# EAGLE board High-Level PCB v3.0 - 100 auto route (EAGLE 8.7.0)
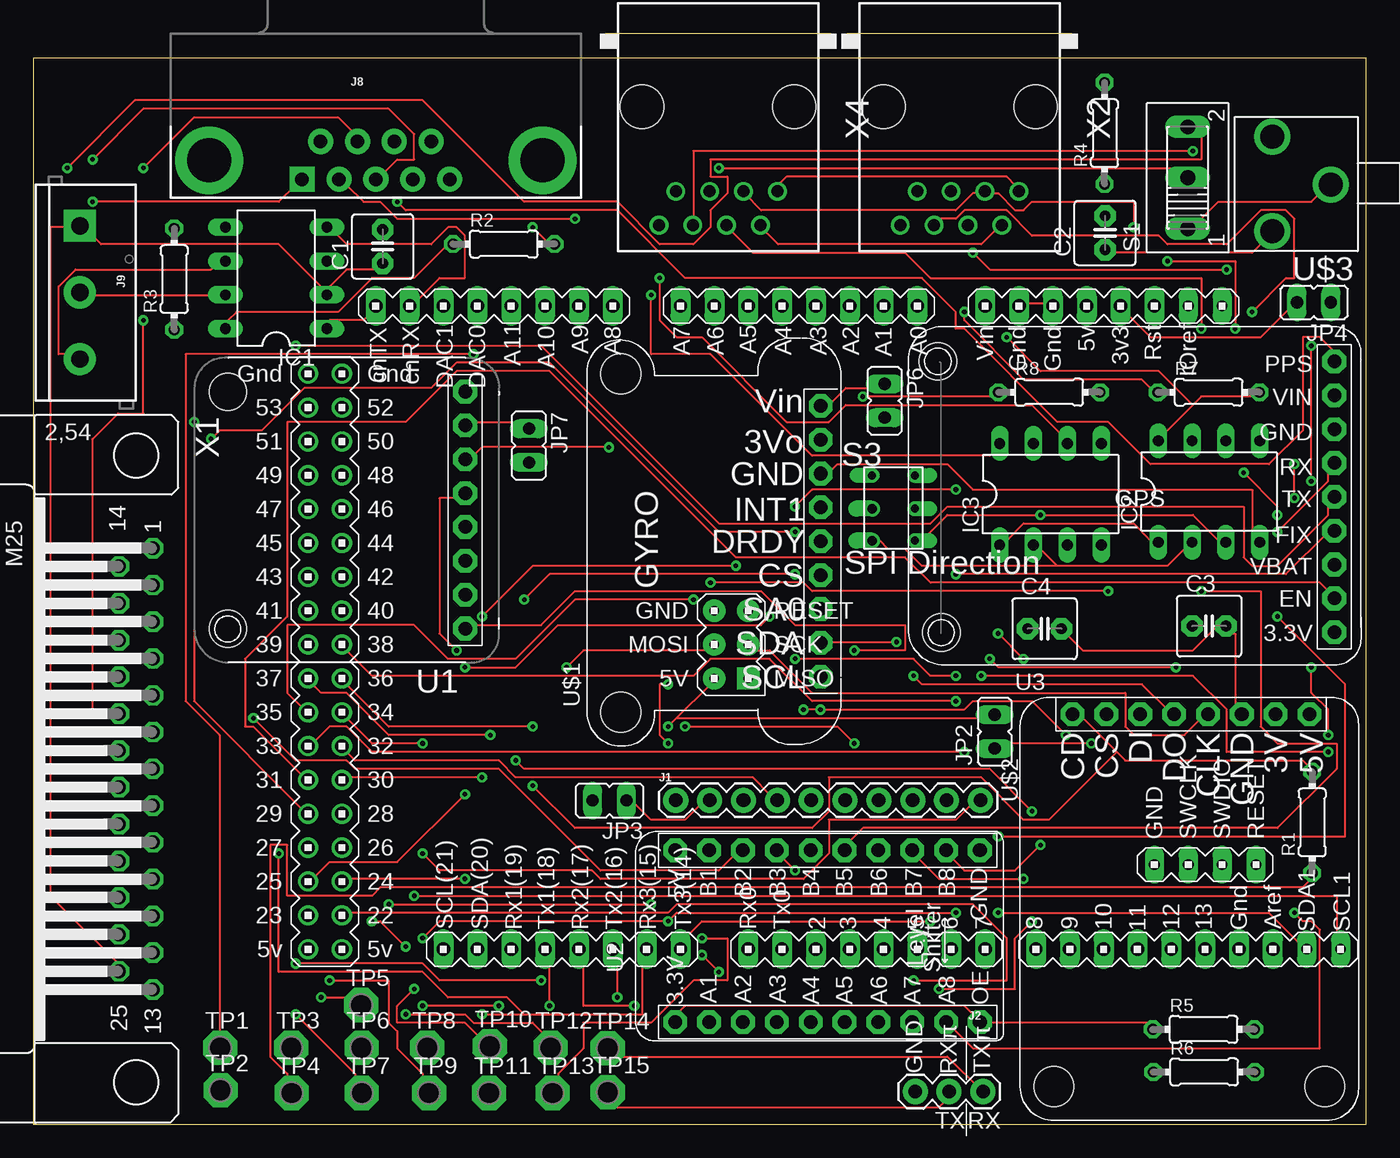
[diagram p0: board, top side]
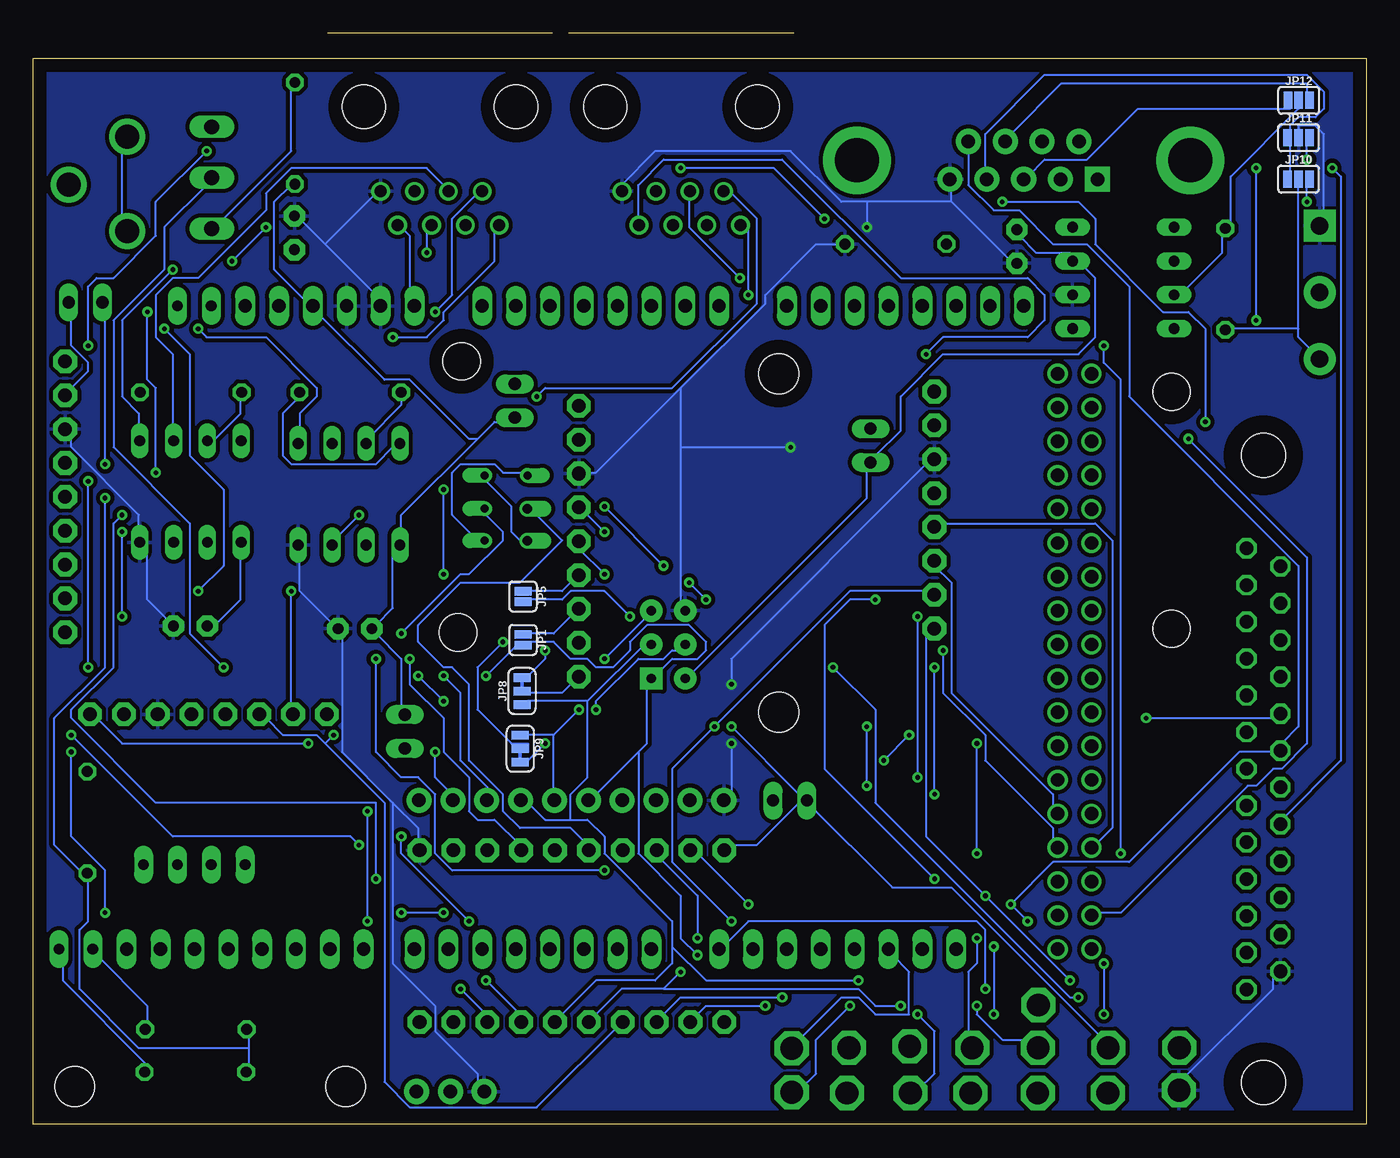
[diagram p1: board, bottom side, seen from below]

Size 100 x 80 mm. Coordinates in mm from the lower left corner, seen from the top.
Outline: 0,0 100,0 100,80 0,80 0,0
Copper layers (1*16): Top 0.035mm / dielectric 1.5mm / Bottom 0.035mm
Design rules "default": minimum track width 6mil, minimum drill 0.35mm, track to track 6mil, track to pad 6mil, pad to pad 6mil, via to via 6mil, smd to smd 6mil, copper to edge 40mil, drill to drill 6mil, minimum pad ring 10mil, minimum via ring 8mil, stop-mask expansion 4mil, vias tented up to drill 0mil, thermal gap 10mil
Net classes: 1 Power: width 0.508 mm, drill 0.305 mm, clearance 0.254 mm

## Footprints (pad centres in the part's own frame; a part is rotated, then mirrored left to right if it is on the bottom)
C2.5-5 = drill 0.813 pad 1.6 octagon: 1 -1.27,0; 2 1.27,0
DIL08 = drill 0.813 long: 1 -3.81,-3.81; 2 -1.27,-3.81; 3 1.27,-3.81; 4 3.81,-3.81; 5 3.81,3.81; 6 1.27,3.81; 7 -1.27,3.81; 8 -3.81,3.81
1X10 = drill 1.016 pad 1.88: 1 0,0; 2 2.54,0; 3 5.08,0; 4 7.62,0; 5 10.16,0; 6 12.7,0; 7 15.24,0; 8 17.78,0; 9 20.32,0; 10 22.86,0
1X03 = drill 1.016 pad 1.88: 1 2.54,0; 2 0,0; 3 -2.54,0
DB9_MALE = drill 1.016 pad 1.88: 1 5.54,-1.42; 2 2.77,-1.42; 3 0,-1.42; 4 -2.77,-1.42; 6 4.15,1.42; 7 1.38,1.42; 8 -1.38,1.42; 9 -4.15,1.42 | drill 1.016 pad 1.88 square: 5 -5.54,-1.42 | drill 3.302 pad 5.08: G1 -12.5,0; G2 12.5,0
SCREWTERMINAL-5MM-3 = drill 1.3 pad 2.413 square: 1 0,0 | drill 1.3 pad 2.413: 2 5,0; 3 10,0
SMT-JUMPER_2_NO_SILK = smd 0.635 x 1.27: 1 -0.406,0; 2 0.406,0
JP1 = drill 0.914 long: 1 0,-1.27; 2 0,1.27
SMT-JUMPER_3_1-NC_TRACE_SILK = smd 0.635 x 1.27: 1 -1.016,0; 2 0,0; 3 1.016,0
SMT-JUMPER_3_NO_SILK = smd 0.635 x 1.27: 1 -0.813,0; 2 0,0; 3 0.813,0
DUE(NORMAL) = drill 1 long: 2 -16.51,30.48; 3 -19.05,30.48; 3V3 -39.37,-17.78; 4 -21.59,30.48; 5 -24.13,30.48; 5V -36.83,-17.78; 6 -26.67,30.48; 7 -29.21,30.48; 8 -33.02,30.48; 9 -35.56,30.48; 10 -38.1,30.48; 11 -40.64,30.48; 12 -43.18,30.48; 13 -45.72,30.48; A0 -24.13,-17.78; A1 -21.59,-17.78; A2 -19.05,-17.78; A3 -16.51,-17.78; A4 -13.97,-17.78; A5 -11.43,-17.78; A6 -8.89,-17.78; A7 -6.35,-17.78; A8 -1.27,-17.78; A9 1.27,-17.78; A10 3.81,-17.78; A11 6.35,-17.78; AREF -50.8,30.48; CANRX 13.97,-17.78; CANTX 16.51,-17.78; DAC0 8.89,-17.78; DAC1 11.43,-17.78; GND1 -48.26,30.48; GND_1 -34.29,-17.78; GND_2 -31.75,-17.78; RESET -41.91,-17.78; RX0 -11.43,30.48; RX1 6.35,30.48; RX2 1.27,30.48; RX3 -3.81,30.48; SCL 11.43,30.48; SDA 8.89,30.48; TX0 -13.97,30.48; TX1 3.81,30.48; TX2 -1.27,30.48; TX3 -6.35,30.48; VIN -29.21,-17.78 | drill 1: 5V_A 19.05,30.48; 5V_B 21.59,30.48; 22 19.05,27.94; 23 21.59,27.94; 24 19.05,25.4; 25 21.59,25.4; 26 19.05,22.86; 27 21.59,22.86; 28 19.05,20.32; 29 21.59,20.32; 30 19.05,17.78; 31 21.59,17.78; 32 19.05,15.24; 33 21.59,15.24; 34 19.05,12.7; 35 21.59,12.7; 36 19.05,10.16; 37 21.59,10.16; 38 19.05,7.62; 39 21.59,7.62; 40 19.05,5.08; 41 21.59,5.08; 42 19.05,2.54; 43 21.59,2.54; 44 19.05,0; 45 21.59,0; 46 19.05,-2.54; 47 21.59,-2.54; 48 19.05,-5.08; 49 21.59,-5.08; 50 19.05,-7.62; 51 21.59,-7.62; 52 19.05,-10.16; 53 21.59,-10.16; GND_A 19.05,-12.7; GND_B 21.59,-12.7 | drill 0.7 pad 1.676: 5V_ICSP -8.89,5.08; GND_ICSP -8.89,10.16; MOSI_ICSP -8.89,7.62; RESET_ICSP -11.43,5.08; SCK_ICSP -11.43,7.62 | drill 0.8 pad 1.422 long: GND_DEBUG -41.91,24.13; IOREF -44.45,-17.78; NC -46.99,-17.78; RESET_DEBUG -49.53,24.13; SCL1 -55.88,30.48; SDA1 -53.34,30.48; SWCLK_DEBUG -44.45,24.13; SWDIO_DEBUG -46.99,24.13 | drill 0.7 pad 1.676 square: MISO_ICSP -11.43,10.16
0204/7 = drill 0.813 octagon: 1 -3.81,0; 2 3.81,0
255SB = drill 1.118 long: 1 -3.81,0; 2 0,0; 3 3.81,0
DPDT = drill 0.6 offset: 1 3.2,4.9; 2 3.2,2.4; 3 3.2,0; 4 0,4.9 | drill 0.7 offset: 5 0,2.4; 6 0,0
P1-17 = drill 1.702 pad 2.54 octagon: TP 0,0
ELCOMPASS = drill 1.016 pad 1.778 octagon: 1 1.27,1.27; 2 1.27,3.81; 3 1.27,6.35; 4 1.27,8.89; 5 1.27,11.43; 6 1.27,13.97; 7 1.27,16.51; 8 1.27,19.05 | hole 2.8: 19.066,19.07; 19.066,1.29
ELSHIFTER = drill 1.016 pad 1.778 octagon: 1 0,11.43; 2 0,8.89; 3 0,6.35; 4 0,3.81; 5 0,1.27; 6 0,-1.27; 7 0,-3.81; 8 0,-6.35; 9 0,-8.89; 10 0,-11.43; 11 12.89,11.43; 12 12.89,8.89; 13 12.89,6.35; 14 12.89,3.81; 15 12.89,1.27; 16 12.89,-1.27; 17 12.89,-3.81; 18 12.89,-6.35; 19 12.89,-8.89; 20 12.89,-11.43
ELGPS = drill 1.016 pad 1.778 octagon: 1 0,-10.16; 2 0,-7.62; 3 0,-5.08; 4 0,-2.54; 5 0,0; 6 0,2.54; 7 0,5.08; 8 0,7.62; 9 0,10.16 | hole 2.8: 29.48,10.18; 29.74,-10.18
ELGYRO = drill 1.016 pad 1.778 octagon: 1 21.59,2.54; 2 19.05,2.54; 3 16.51,2.54; 4 13.97,2.54; 5 11.43,2.54; 6 8.89,2.54; 7 6.35,2.54; 8 3.81,2.54; 9 1.27,2.54 | hole 3: -1.397,17.526; 24.003,17.526
ELSDCARD = drill 1.016 pad 1.778 octagon: 1 1.27,1.27; 2 1.27,3.81; 3 1.27,6.35; 4 1.27,8.89; 5 1.27,11.43; 6 1.27,13.97; 7 1.27,16.51; 8 1.27,19.05 | hole 3: -26.67,0.127; -26.67,20.447
2.5MMJACK = drill 1.8: 1 2,5.1; 2 6.4,1.5; 3 6.4,8.6
M25H = drill 1.016 octagon: 1 -16.561,1.27; 2 -13.792,1.27; 3 -11.049,1.27; 4 -8.28,1.27; 5 -5.512,1.27; 6 -2.769,1.27; 7 0,1.27; 8 2.769,1.27; 9 5.512,1.27; 10 8.28,1.27; 11 11.049,1.27; 12 13.792,1.27; 13 16.561,1.27; 14 -15.189,-1.27; 15 -12.421,-1.27; 16 -9.652,-1.27; 17 -6.909,-1.27; 18 -4.14,-1.27; 19 -1.372,-1.27; 20 1.372,-1.27; 21 4.14,-1.27; 22 6.909,-1.27; 23 9.652,-1.27; 24 12.421,-1.27; 25 15.189,-1.27 | hole 3.302: 23.52,0; -23.52,0
RJ45-NO-SHIELD = drill 0.9 pad 1.4: 1 -4.445,6.35; 2 -3.175,8.89; 3 -1.905,6.35; 4 -0.635,8.89; 5 0.635,6.35; 6 1.905,8.89; 7 3.175,6.35; 8 4.445,8.89 | hole 3.251: -5.715,0; 5.715,0

## Placement (x,y rotation side)
C1  0.1 uF  [C2.5-5]  26.21,65.87 90 top
C2  1 uF  [C2.5-5]  80.41,66.89 90 top
C3  0.1 uF  [C2.5-5]  88.22,37.39 0 top
C4  0.1 uF  [C2.5-5]  75.87,37.19 0 top
IC1  MCP2551  [DIL08]  18.22,63.51 90 top
IC2  DS8921  [DIL08]  88.21,47.48 0 top
IC3  DS8921  [DIL08]  76.31,47.28 0 top
J1  Optical Mouse  [1X10]  48.2,24.32 0 top
J2  RaspπUart  [1X03]  68.71,2.46 0 top
J8  DB9 Plug  [DB9_MALE]  25.7,72.33 0 top
J9  CAN Output  [SCREWTERMINAL-5MM-3]  3.49,67.42 270 top
JP1  [SMT-JUMPER_2_NO_SILK]  63.27,36.35 270 bottom
JP2  MicroSD Power  [JP1]  72.12,29.47 0 top
JP3  Mouse Power  [JP1]  43.23,24.3 90 top
JP4  GPS Power  [JP1]  96.08,61.67 90 top
JP5  [SMT-JUMPER_2_NO_SILK]  63.27,39.61 270 bottom
JP6  Gyro Power  [JP1]  63.88,54.29 180 top
JP7  Compass Power  [JP1]  37.19,50.93 180 top
JP8  [SMT-JUMPER_3_1-NC_TRACE_SILK]  63.33,32.5 90 bottom
JP9  [SMT-JUMPER_3_1-NC_TRACE_SILK]  63.47,28.19 270 bottom
JP10  [SMT-JUMPER_3_NO_SILK]  5.08,70.93 0 bottom
JP11  [SMT-JUMPER_3_NO_SILK]  5.07,74.03 0 bottom
JP12  [SMT-JUMPER_3_NO_SILK]  5.06,76.83 0 bottom
MCU2  DUE(NORMAL)  [DUE(NORMAL)]  42.2,43.62 180 top
R1  4.7 k  [0204/7]  95.95,22.66 90 top
R2  10 k  [0204/7]  35.3,66.05 0 top
R3  120  [0204/7]  10.57,63.42 90 top
R4  4.7 k  [0204/7]  80.37,74.36 90 top
R5  4.7 k  [0204/7]  87.8,7.13 0 top
R6  4.7 k  [0204/7]  87.84,3.93 0 top
R7  100  [0204/7]  88.18,54.93 0 top
R8  100  [0204/7]  76.22,54.93 0 top
S1  Click Source  [255SB]  86.61,71.03 90 top
S3  SPI Direction  [DPDT]  62.93,43.79 0 top
TP1  TPPAD1-17  [P1-17]  14.02,5.75 0 top
TP2  TPPAD1-17  [P1-17]  14.04,2.55 0 top
TP3  TPPAD1-17  [P1-17]  19.36,5.75 0 top
TP4  TPPAD1-17  [P1-17]  19.38,2.35 0 top
TP5  TPPAD1-17  [P1-17]  24.6,8.95 0 top
TP6  TPPAD1-17  [P1-17]  24.62,5.75 0 top
TP7  TPPAD1-17  [P1-17]  24.64,2.35 0 top
TP8  TPPAD1-17  [P1-17]  29.56,5.75 0 top
TP9  TPPAD1-17  [P1-17]  29.68,2.35 0 top
TP10  TPPAD1-17  [P1-17]  34.25,5.85 0 top
TP11  TPPAD1-17  [P1-17]  34.2,2.35 0 top
TP12  TPPAD1-17  [P1-17]  38.8,5.75 0 top
TP13  TPPAD1-17  [P1-17]  38.95,2.35 0 top
TP14  TPPAD1-17  [P1-17]  43.1,5.7 0 top
TP15  TPPAD1-17  [P1-17]  43.1,2.4 0 top
U1  COMPASS  [ELCOMPASS]  33.67,56.25 180 top
U2  LLSHIFTER  [ELSHIFTER]  59.59,7.67 90 top
U3  GPS  [ELGPS]  97.61,47.08 180 top
U$1  Gyro  [ELGYRO]  61.61,32.32 90 top
U$2  Micro-SD  [ELSDCARD]  97.02,29.5 90 top
U$3  [2.5MMJACK]  99.36,75.6 180 top
X1  Vehicle control  [M25H]  7.71,26.67 270 top
X2  RJ45-8L-B  [RJ45-NO-SHIELD]  69.49,76.35 180 top
X4  RJ45-8L-B  [RJ45-NO-SHIELD]  51.38,76.35 180 top

## Library data of the parts
C1-C4 = capacitor-wima
IC1-IC3 = ic-package
J1 = SparkFun-Connectors; PROD_ID: CONN-11563
J2 = tx_rxRasp
J8 = SparkFun-Connectors; PROD_ID: CONN-09904; SPICEPREFIX: X
J9 = SparkFun-Connectors; PROD_ID: CONN-10134; SF_SKU: PRT-08433
JP1 JP5 JP8-JP12 = SparkFun-Jumpers
JP2-JP4 JP6 JP7 = jumper
MCU2 = DUElib130425
R1 R4-R6 = resistor
R2 R3 R7 R8 = rcl; SPICEPREFIX: R
S1 = switch
S3 U$1-U$3 = ELCano_Footprints
TP1-TP15 = testpad
U1 = ELCOMPASS
U2 = ELSHIFTER
U3 = ELGPS
X1 = con-subd; OC_FARNELL: unknown; OC_NEWARK: unknown
X2 X4 = con-tycoelectronics; MF: TYCO ELECTRONICS; MPN: RJ45-8L-B; OC_FARNELL: 1279843; OC_NEWARK: 52K4445

## Nets
+3V3: JP4.2 MCU2.3V3 R1.1 R5.1 R6.1 TP4.TP U2.1 U2.10
+5V: C1.2 C3.1 C4.1 IC1.3 IC2.1 IC3.1 JP2.2 JP3.2 JP6.2 JP7.2 MCU2.5V MCU2.GND_ICSP R4.1 TP3.TP U2.11
C2_RX: J8.8 TP13.TP U2.13 X1.18
C2_TX: J8.6 TP12.TP U2.12 X1.19
CANH: IC1.7 J9.2 JP12.2 R3.2
CANL: IC1.6 J9.3 JP10.2 R3.1
CANRX: IC1.4 MCU2.CANRX
CANTX: IC1.1 MCU2.CANTX
CARD_DETECT: MCU2.36 R1.2 U$2.8
CLICK: J8.4 S1.2 U2.17
CS_C5_FRONT: MCU2.37 U2.8
CS_C5_FRONT_5V: U2.18 X2.6
CS_C5_REAR: MCU2.38 U2.9
CS_C5_REAR_5V: U2.19 X4.6
CS_GYRO: JP5.2 MCU2.25
CS_MOUSE: J1.4 MCU2.32
CS_SD: MCU2.35 U$2.7
DRDY_C: MCU2.26 U1.4
DRDY_G: MCU2.24 U$1.5
EN: MCU2.31 U3.8
FIX: MCU2.30 U3.6
GND: C1.1 C2.2 C3.2 C4.2 IC1.2 IC2.4 IC3.4 J1.1 J2.3 J8.1 J9.1 JP11.2 MCU2.5V_ICSP MCU2.GND_1 MCU2.GND_2 R2.2 TP2.TP U1.3 U2.20 U3.3 U$1.3 U$2.3 X1.25 X2.1 X4.1
GPS_RX: MCU2.TX3 TP10.TP U3.4
GPS_TX: MCU2.RX3 TP11.TP U3.5
I1: MCU2.27 U1.5
I2: MCU2.28 U1.6
INT1: MCU2.23 U$1.4
LED: J1.10 MCU2.34
MISO: J1.5 JP1.2 MCU2.MISO_ICSP TP6.TP U2.5 U$2.5
MISO+: IC2.6 X2.5
MISO+R: IC3.6 X4.5
MISO-: IC2.5 X2.4
MISO-R: IC3.5 X4.4
MISO_5V: S3.5 U2.15
MOSI: J1.6 JP9.1 MCU2.MOSI_ICSP TP5.TP U2.4 U$2.6
MOSI+: IC2.8 R7.2 X2.8
MOSI+R: IC3.8 R8.2 X4.8
MOSI-: IC2.7 R7.1 X2.7
MOSI-R: IC3.7 R8.1 X4.7
MOSI_5V: S3.2 U2.14
N$1: C2.1 U$3.2 U$3.3
N$2: IC2.2 IC3.2 S3.1 S3.6
N$3: IC2.3 IC3.3 S3.3 S3.4
N$4: MCU2.TX2 U2.3
N$5: MCU2.RX2 U2.2
N$6: S1.3 X1.21
N$7: R4.2 S1.1 U$3.1
N$8: JP7.1 U1.2
N$9: JP6.1 U$1.1
N$10: JP2.1 U$2.1
N$11: J8.3 JP11.3 JP12.1
N$12: MCU2.22 U2.7
N$13: J1.2 JP3.1
N$14: JP4.1 U3.2
N$15: J8.5 JP10.3
N$16: J8.7 JP12.3
N$17: IC1.8 R2.1
N$18: J8.2 JP10.1 JP11.1
N$19: JP5.1 U$1.6
N$20: JP1.1 U$1.7
N$21: JP9.2 U$1.8
N$22: JP8.2 U$1.9
NPD: J1.9 MCU2.33
PPS: MCU2.29 U3.1
RPI_RX: J2.2 MCU2.TX1 TP15.TP
RPI_TX: J2.1 MCU2.RX1 TP14.TP
RST: J1.8 MCU2.RESET_ICSP
SCK: J1.7 JP8.1 MCU2.SCK_ICSP TP7.TP U2.6 U$2.4
SCK_5V: U2.16 X2.3 X4.3
SCL1: JP8.3 MCU2.SCL1 R6.2 TP9.TP U1.8
SDA1: JP9.3 MCU2.SDA1 R5.2 TP8.TP U1.7
VIN: MCU2.VIN TP1.TP X2.2 X4.2

## Tracks (layer width: path | path; a pad name or v marks a point on that pad's centre or on a via)
+3V3  (via drill 0.35)
  Top 0.152: U2.1 48.26,8.26 48.9,8.89 69.85,8.89 70.48,8.26 U2.10 71.12,7.62 83.82,7.62 R5.1 | JP4.2 94.61,61.59 92.08,59.05 83.82,59.05 81.92,60.96 MCU2.3V3 | TP4.TP 19.05,2.54 19.05,3.81 17.78,5.08 17.78,20.95 19.05,20.95 19.05,17.14 25.4,17.14 26.04,17.78 95.25,17.78 95.89,18.41 R1.1 | v94.61,46.99 v94.61,49.53
  Bottom 0.152: 83.82,5.71 83.82,4.45 R6.1 | 83.82,5.71 83.82,6.99 R5.1 | 83.82,5.71 92.08,5.71 96.52,10.16 96.52,14.61 95.89,15.24 95.89,18.41 R1.1 96.52,19.05 98.42,20.95 98.42,30.48 94.61,34.29 v94.61,46.99 | v94.61,49.53 94.61,61.59 JP4.2
+5V  (via drill 0.35)
  Top 0.152: IC2.1 83.82,43.81 82.55,45.09 74.3,45.09 73.03,43.81 IC3.1 | 48.26,30.48 50.8,33.02 MCU2.GND_ICSP | 48.26,30.48 v47.62,29.84 | 48.26,30.48 71.75,30.48 JP2.2
  Bottom 0.152: R4.1 80.64,70.48 81.92,69.22 81.92,64.14 79.38,61.59 MCU2.5V 78.74,60.96 73.66,55.88 71.75,55.88 67.31,51.44 66.67,51.44 | IC2.1 84.45,43.18 84.45,39.37 86.36,37.47 C3.1 | JP2.2 72.39,31.11 72.39,34.92 74.3,36.83 C4.1 74.3,37.47 73.03,38.73 73.03,43.18 IC3.1 72.39,43.81 72.39,45.72 66.67,51.44 | 66.67,51.44 65.41,52.7 64.14,52.7 JP6.2 | JP3.2 42.55,24.13 45.72,20.95 47.62,20.95 U2.11 | TP3.TP 19.68,6.35 31.11,17.78 35.56,17.78 41.91,24.13 JP3.2 | C1.2 26.04,66.67 24.77,65.41 22.23,65.41 IC1.3 21.59,64.77 20.32,63.5 20.32,59.05 21.59,57.78 31.75,57.78 34.92,54.61 34.92,52.07 36.83,50.16 JP7.2 37.47,49.53 37.47,46.99 50.8,33.66 MCU2.GND_ICSP | v47.62,29.84 42.55,24.77 JP3.2
C2_RX  (via drill 0.35)
  Top 0.152: v16.51,30.48 19.68,27.3 23.5,27.3 24.13,26.67 34.92,26.67 42.55,19.05 51.44,19.05 52.7,20.32 U2.13 | v8.26,71.75 12.06,75.56 22.86,75.56 24.13,74.3 J8.8 | v8.26,60.33 8.26,53.34 6.35,53.34 4.45,51.44 4.45,31.11 6.35,31.11 X1.18 | v50.16,13.97 52.07,13.97 52.07,10.79 49.53,10.79 46.35,7.62 41.27,7.62 41.27,5.71 39.37,3.81 39.37,2.54 TP13.TP
  Bottom 0.152: v16.51,30.48 6.99,30.48 X1.18 | v8.26,60.33 v8.26,71.75 | v50.16,13.97 50.16,17.14 53.34,20.32 U2.13
C2_TX  (via drill 0.35)
  Top 0.152: v26.67,16.51 v46.35,16.51 | v27.94,8.26 32.38,8.26 33.02,7.62 37.47,7.62 38.73,6.35 TP12.TP | v27.94,13.34 26.04,15.24 v25.4,15.24
  Bottom 0.152: J8.6 29.84,73.66 29.84,70.48 27.94,68.58 26.04,68.58 23.5,66.04 20.95,66.04 17.78,62.87 17.78,54.61 5.08,41.91 5.08,29.84 6.35,28.57 X1.19 6.99,27.94 9.53,27.94 17.78,19.68 23.5,19.68 v26.67,16.51 v25.4,15.24 | v46.35,16.51 50.16,20.32 U2.12 | v27.94,13.34 v27.94,8.26
CANH
  Top 0.152: IC1.7 13.97,62.23 3.81,62.23 J9.2
  Bottom 0.152: JP12.2 5.08,76.2 10.16,71.12 10.16,67.31 R3.2 10.79,66.67 10.79,65.41 13.97,62.23 IC1.7
CANL
  Top 0.152: IC1.6 13.97,64.77 13.34,64.14 3.17,64.14 1.91,62.87 1.91,57.78 3.17,57.78 J9.3
  Bottom 0.152: 5.08,59.69 5.08,59.05 3.81,57.78 J9.3 | 5.08,59.69 JP10.2 | 5.08,59.69 10.16,59.69 R3.1
CANRX
  Top 0.152: IC1.4 22.23,67.31 23.5,66.04 29.84,66.04 31.11,67.31 31.75,67.31 32.38,66.67 32.38,63.5 30.48,63.5 28.57,61.59 MCU2.CANRX
CANTX
  Top 0.152: IC1.1 22.23,60.33 24.77,60.33 25.4,60.96 MCU2.CANTX
CARD_DETECT  (via drill 0.35)
  Top 0.152: 81.28,27.94 78.74,30.48 78.11,30.48 U$2.8 | 81.28,27.94 81.92,27.3 95.25,27.3 95.89,26.67 R1.2 | v37.47,29.84 26.67,29.84 23.5,33.02 MCU2.36 | v37.47,25.4 40.64,22.23 58.42,22.23 59.69,23.5 59.69,26.04 71.12,26.04 74.3,22.86 76.2,22.86 81.28,27.94
  Bottom 0.152: v37.47,25.4 v37.47,29.84
CLICK  (via drill 0.35)
  Top 0.152: v51.44,71.75 85.72,71.75 86.36,71.12 S1.2 | v40.64,67.94 27.3,67.94 26.04,69.22 24.77,69.22 23.5,70.48 J8.4 | v71.75,34.92 72.39,34.29 v85.72,34.29
  Bottom 0.152: v51.44,71.75 44.45,71.75 v40.64,67.94 | v71.75,34.92 71.75,33.02 69.22,30.48 69.22,27.94 67.31,26.04 67.31,23.5 66.67,22.86 65.41,22.86 63.5,20.95 U2.17 | v85.72,34.29 88.27,36.83 88.27,45.09 93.98,50.8 93.98,60.33 90.17,64.14 90.17,67.31 87,70.48 S1.2
CS_C5_FRONT  (via drill 0.35)
  Top 0.152: v34.29,29.21 26.67,29.21 23.5,32.38 21.59,32.38 20.95,33.02 MCU2.37 | v36.2,27.3 36.83,26.67 71.75,26.67 v74.93,23.5 | v74.93,15.24 73.66,13.97 73.66,10.16 v67.94,10.16
  Bottom 0.152: v36.2,27.3 v34.29,29.21 | v74.93,15.24 v74.93,23.5 | v67.94,10.16 66.04,8.26 U2.8
CS_C5_FRONT_5V  (via drill 0.35)
  Top 0.152: v91.44,60.96 93.98,63.5 94.61,63.5 94.61,67.94 93.98,68.58 92.08,68.58 89.53,66.04 85.09,66.04 84.45,66.67 74.93,66.67 73.03,68.58 69.85,68.58 69.22,67.94 67.94,67.94 X2.6 | v90.81,48.9 93.34,46.35 v93.34,45.72 | v74.3,18.41 67.94,18.41 66.04,20.32 U2.18
  Bottom 0.152: v91.44,60.96 91.44,55.88 90.81,55.24 v90.81,48.9 | v93.34,45.72 93.98,45.09 93.98,34.29 97.16,31.11 97.16,30.48 90.81,24.13 74.3,24.13 v74.3,18.41
CS_C5_REAR  (via drill 0.35)
  Top 0.152: v69.22,31.75 58.42,31.75 55.24,34.92 50.8,34.92 49.53,33.66 25.4,33.66 23.5,35.56 MCU2.38 | v71.12,33.66 87,33.66 89.53,31.11 89.53,27.94 v97.16,27.94 | v94.61,15.88 95.25,15.24 95.89,15.24 96.52,14.61 96.52,5.71 70.48,5.71 68.58,7.62 U2.9
  Bottom 0.152: v71.12,33.66 v69.22,31.75 | v97.16,27.94 97.16,21.59 94.61,19.05 v94.61,15.88
CS_C5_REAR_5V  (via drill 0.35)
  Top 0.152: v87,73.03 49.53,73.03 49.53,67.94 X4.6 | v95.89,48.26 v95.89,58.42 | v95.89,34.29 95.89,32.38 97.16,31.11 v97.16,29.21 | v75.56,20.95 73.66,19.05 69.85,19.05 68.58,20.32 U2.19
  Bottom 0.152: v87,73.03 90.81,69.22 90.81,66.67 93.98,63.5 95.25,63.5 95.89,62.87 v95.89,58.42 | v95.89,34.29 v95.89,48.26 | v97.16,29.21 89.53,21.59 76.2,21.59 v75.56,20.95
CS_GYRO  (via drill 0.35)
  Top 0.152: v55.24,38.1 54.61,37.47 39.37,37.47 36.2,34.29 v32.38,34.29 | v32.38,24.77 27.3,19.68 22.23,19.68 20.95,18.41 MCU2.25
  Bottom 0.152: v55.24,38.1 57.15,40.01 59.69,40.01 60.33,39.37 62.87,39.37 JP5.2 | v32.38,24.77 v32.38,34.29
CS_MOUSE
  Top 0.152: MCU2.32 23.5,27.94 24.13,27.3 34.92,27.3 36.2,26.04 53.98,26.04 55.24,24.77 J1.4
CS_SD  (via drill 0.35)
  Top 0.152: v49.53,39.37 40.64,39.37 36.2,34.92 31.11,34.92 28.57,37.47 19.05,37.47 19.05,32.38 20.32,31.11 MCU2.35 | v50.8,40.64 57.78,40.64 58.42,40.01 v80.64,40.01
  Bottom 0.152: v50.8,40.64 v49.53,39.37 | v80.64,40.01 80.64,31.11 U$2.7
DRDY_C  (via drill 0.35)
  Top 0.152: v31.75,35.56 30.48,36.83 30.48,46.99 32.38,46.99 U1.4
  Bottom 0.152: v31.75,35.56 31.75,32.38 28.57,29.21 28.57,27.3 23.5,22.23 23.5,20.95 MCU2.26
DRDY_G  (via drill 0.35)
  Top 0.152: v32.38,18.41 23.5,18.41 MCU2.24 | v36.83,39.37 38.73,41.27 v57.15,41.27
  Bottom 0.152: v32.38,18.41 40.64,26.67 40.64,37.47 38.73,39.37 v36.83,39.37 | v57.15,41.27 59.05,43.18 U$1.5
EN
  Top 0.152: MCU2.31 20.32,26.04 16.51,29.84 15.88,29.84 15.88,34.92 19.05,38.1 19.05,52.7 27.94,52.7 31.75,56.52 38.73,56.52 52.7,42.55 65.41,42.55 67.31,40.64 96.52,40.64 97.16,40.01 U3.8
FIX  (via drill 0.35)
  Top 0.152: v33.66,26.04 23.5,26.04 MCU2.30 | v33.66,38.1 37.47,41.91 v52.7,41.91 | v57.15,46.35 58.42,47.62 v69.22,47.62 | v69.22,41.27 93.98,41.27 97.16,44.45 U3.6
  Bottom 0.152: v33.66,38.1 v33.66,26.04 | v57.15,46.35 v52.7,41.91 | v69.22,41.27 v69.22,47.62
GND  (via drill 0.35)
  Top 0.152: U$2.3 90.17,31.11 90.17,36.83 89.53,36.83 C3.2 88.9,37.47 87,35.56 78.74,35.56 77.47,36.83 C4.2 | v43.18,50.8 33.66,50.8 33.02,50.16 U1.3 | v47.62,28.57 46.99,29.21 46.99,33.02 v47.62,33.02 | MCU2.GND_2 74.3,61.59 76.2,61.59 MCU2.GND_1 | X4.1 55.88,70.48 56.52,71.12 73.03,71.12 73.66,70.48 X2.1 | C1.1 26.04,64.14 23.5,64.14 22.23,62.87 IC1.2 21.59,62.87 18.41,66.04 5.08,66.04 3.81,67.31 J9.1 3.17,67.31 1.27,67.31 1.27,17.14 6.35,12.06 X1.25 | v37.47,67.31 38.73,66.04 R2.2 | IC2.4 91.44,43.81 91.44,47.62 70.48,47.62 68.58,49.53 60.33,49.53 59.69,48.9 U$1.3
  Bottom 0.152: C3.2 89.53,37.47 91.44,39.37 91.44,43.18 IC2.4 92.08,43.81 92.08,45.72 97.16,50.8 97.16,52.07 U3.3 | IC3.4 80.01,43.18 80.01,40.01 77.47,37.47 C4.2 76.83,36.83 76.83,27.94 73.03,24.13 | 73.03,24.13 71.12,22.23 71.12,20.95 U2.20 | 73.03,24.13 73.03,12.06 69.85,8.89 69.85,6.99 66.67,3.81 66.67,2.54 J2.3 | 51.44,55.24 57.78,48.9 59.05,48.9 U$1.3 | 51.44,55.24 45.09,61.59 45.09,62.23 41.27,66.04 39.37,66.04 R2.2 | 51.44,55.24 51.44,50.8 | 51.44,50.8 51.44,38.73 MCU2.5V_ICSP | 51.44,50.8 v43.18,50.8 | v47.62,28.57 47.62,24.77 J1.1 | v47.62,33.02 47.62,34.92 33.02,49.53 U1.3 | 78.11,66.04 73.66,61.59 MCU2.GND_2 | 78.11,66.04 80.01,67.94 C2.2 | 78.11,66.04 74.3,69.85 X2.1 | X1.25 6.99,11.43 6.99,10.16 13.97,3.17 TP2.TP | JP11.2 5.08,74.3 5.08,74.93 3.81,74.93 3.17,74.3 3.17,67.94 J9.1 | 31.11,69.22 31.11,70.48 J8.1 | 31.11,69.22 26.67,64.77 C1.1 | 31.11,69.22 37.47,69.22 | 37.47,69.22 39.37,69.22 43.18,73.03 53.34,73.03 55.88,70.48 X4.1 | 37.47,69.22 v37.47,67.31
  pour Bottom (isolate 0.305): 100,80 0,80 0,0 100,0
GPS_RX  (via drill 0.35)
  Top 0.152: v28.57,10.16 27.3,8.89 27.3,7.62 32.38,7.62 33.66,6.35 TP10.TP | v93.34,44.45 97.16,48.26 97.16,49.53 U3.4 | v93.34,38.1 98.42,33.02 98.42,21.59 v72.39,21.59 | v67.31,15.24 50.16,15.24 48.26,13.34 MCU2.TX3
  Bottom 0.152: v28.57,10.16 28.57,14.61 29.21,15.24 46.35,15.24 48.26,13.34 MCU2.TX3 | v93.34,38.1 v93.34,44.45 | v72.39,21.59 72.39,20.32 v67.31,15.24
GPS_TX  (via drill 0.35)
  Top 0.152: v33.66,8.26 36.83,8.26 | 36.83,8.26 45.72,8.26 45.72,12.7 MCU2.RX3 | v19.68,58.42 38.1,58.42 51.44,45.09 67.31,45.09 68.58,46.35 90.81,46.35 90.81,42.55 91.44,41.91 93.34,41.91 97.16,45.72 97.16,46.99 U3.5 | v18.41,20.32 18.41,11.43 29.21,11.43 31.11,9.53 35.56,9.53 36.83,8.26
  Bottom 0.152: v33.66,8.26 32.38,6.99 32.38,3.81 33.66,2.54 TP11.TP | v19.68,58.42 19.68,57.15 18.41,55.88 v18.41,20.32
I1
  Bottom 0.152: MCU2.27 20.32,20.95 19.05,22.23 19.05,43.81 20.32,45.09 32.38,45.09 U1.5
I2
  Bottom 0.152: MCU2.28 23.5,23.5 23.5,24.77 31.11,32.38 31.11,40.64 32.38,41.91 U1.6
INT1  (via drill 0.35)
  Top 0.152: v13.34,51.44 13.97,52.07 17.14,52.07 20.32,55.24 29.84,55.24 31.75,57.15 38.73,57.15 51.44,44.45 v57.15,44.45
  Bottom 0.152: v13.34,51.44 4.45,42.55 4.45,28.57 6.35,26.67 6.99,26.67 8.26,25.4 8.89,25.4 18.41,15.88 20.32,15.88 MCU2.23 | v57.15,44.45 59.05,46.35 U$1.4
LED  (via drill 0.35)
  Top 0.152: v29.21,28.57 25.4,28.57 23.5,30.48 MCU2.34 | v29.21,20.32 30.48,19.05 41.91,19.05 42.55,18.41 57.78,18.41 59.69,20.32 59.69,22.86 69.22,22.86 70.48,24.13 J1.10
  Bottom 0.152: v29.21,20.32 v29.21,28.57
MISO  (via drill 0.35)
  Top 0.152: v66.04,33.66 66.67,33.02 83.19,33.02 85.09,31.11 U$2.5 | v50.16,12.7 v51.44,11.43 | v34.92,8.89 v29.21,8.89
  Bottom 0.152: v66.04,33.66 63.5,36.2 JP1.2 62.87,36.2 60.96,36.2 59.69,34.92 58.42,34.92 57.78,34.29 56.52,34.29 55.24,35.56 55.24,36.2 53.98,37.47 50.8,37.47 49.53,36.2 49.53,35.56 50.16,34.92 52.07,34.92 53.34,33.66 MCU2.MISO_ICSP 53.98,33.02 53.98,28.57 54.61,27.94 | 54.61,27.94 57.78,24.77 J1.5 | 52.7,10.16 55.88,10.16 57.78,8.26 U2.5 | v51.44,11.43 52.7,10.16 | v50.16,12.7 51.44,13.97 51.44,17.14 54.61,20.32 54.61,27.94 | v29.21,8.89 29.21,8.26 27.3,6.35 24.77,6.35 TP6.TP | v34.92,8.89 36.83,8.89 38.1,10.16 52.7,10.16
MISO+
  Bottom 0.152: IC2.6 89.53,51.44 89.53,57.78 90.81,59.05 90.81,62.23 89.53,63.5 87.63,63.5 82.55,68.58 82.55,69.85 80.64,71.75 70.48,71.75 69.22,70.48 X2.5
MISO+R  (via drill 0.35)
  Top 0.152: v46.99,63.5 46.99,60.33 48.26,59.05 50.16,59.05 56.52,52.7 59.69,52.7 60.96,53.98 74.93,53.98 77.47,51.44 IC3.6
  Bottom 0.152: v46.99,63.5 50.8,67.31 50.8,69.85 X4.5
MISO-  (via drill 0.35)
  Top 0.152: v89.53,64.14 71.75,64.14 v70.48,65.41
  Bottom 0.152: v89.53,64.14 93.34,60.33 93.34,54.61 92.08,53.34 92.08,51.44 IC2.5 | v70.48,65.41 70.48,67.31 X2.4
MISO-R  (via drill 0.35)
  Top 0.152: v87.63,59.69 87.63,63.5 67.31,63.5 65.41,65.41 53.98,65.41 52.07,67.31 X4.4
  Bottom 0.152: v87.63,59.69 87,59.05 82.55,59.05 78.74,55.24 78.74,54.61 80.01,53.34 80.01,51.44 IC3.5
MISO_5V
  Bottom 0.152: S3.5 62.87,45.72 62.23,45.72 60.33,43.81 63.5,40.64 67.94,40.64 71.12,37.47 71.12,36.2 69.22,34.29 68.58,34.29 67.31,33.02 67.31,27.3 64.77,24.77 64.77,23.5 63.5,22.23 59.69,22.23 58.42,20.95 U2.15
MOSI  (via drill 0.35)
  Top 0.152: v57.78,31.11 v59.05,31.11 69.85,31.11 70.48,31.75 74.93,31.75 v77.47,29.21 | v21.59,9.53 24.13,9.53 TP5.TP | v40.01,34.29 41.27,35.56 50.8,35.56 MCU2.MOSI_ICSP
  Bottom 0.152: 78.11,28.57 78.74,29.21 81.28,29.21 82.55,30.48 U$2.6 | 78.11,28.57 73.66,24.13 73.66,3.17 71.75,1.27 62.23,1.27 55.88,7.62 U2.4 | 60.96,29.21 62.87,29.21 JP9.1 | 60.96,29.21 60.96,24.77 J1.6 | v57.78,31.11 57.78,31.75 54.61,34.92 52.7,34.92 52.07,35.56 51.44,35.56 MCU2.MOSI_ICSP | 60.96,29.21 v59.05,31.11 | v21.59,9.53 22.23,9.53 36.83,24.13 36.83,31.11 v40.01,34.29 | v77.47,29.21 78.11,28.57
MOSI+  (via drill 0.35)
  Top 0.152: 87,53.98 87.63,54.61 91.44,54.61 R7.2 | 87,53.98 84.45,51.44 IC2.8 | v73.03,59.05 75.56,56.52 84.45,56.52 87,53.98
  Bottom 0.152: v73.03,59.05 70.48,59.05 69.22,60.33 69.22,60.96 65.41,64.77 65.41,67.31 X2.8
MOSI+R  (via drill 0.35)
  Top 0.152: v46.35,62.23 46.35,57.78 50.8,57.78 58.42,50.16 71.75,50.16 72.39,50.8 IC3.8
  Bottom 0.152: IC3.8 73.03,50.8 74.3,49.53 80.64,49.53 81.28,50.16 81.28,53.34 80.01,54.61 R8.2 | v46.35,62.23 46.35,67.31 X4.8
MOSI-  (via drill 0.35)
  Top 0.152: v69.85,60.96 69.85,60.33 74.3,55.88 83.19,55.88 83.82,55.24 R7.1
  Bottom 0.152: R7.1 84.45,54.61 84.45,53.34 86.36,51.44 IC2.7 | v69.85,60.96 68.58,62.23 68.58,67.94 66.67,69.85 X2.7
MOSI-R  (via drill 0.35)
  Top 0.152: v62.23,54.61 72.39,54.61 R8.1
  Bottom 0.152: IC3.7 74.93,51.44 72.39,53.98 72.39,54.61 R8.1 | v62.23,54.61 61.59,55.24 52.07,55.24 45.72,61.59 45.72,67.94 47.62,69.85 X4.7
MOSI_5V  (via drill 0.35)
  Top 0.152: v74.3,34.92 v72.39,36.83 | v57.15,19.05 55.88,20.32 U2.14
  Bottom 0.152: v72.39,36.83 67.94,41.27 67.31,41.27 64.77,43.81 64.77,44.45 66.04,45.72 S3.2 | v74.3,34.92 74.3,27.94 72.39,26.04 71.12,26.04 69.85,24.77 69.85,20.32 68.58,19.05 v57.15,19.05
N$1
  Top 0.152: C2.1 80.64,65.41 91.44,65.41 92.71,66.67 U$3.3
  Bottom 0.152: U$3.2 93.34,73.66 93.34,67.31 U$3.3
N$2
  Top 0.152: 76.83,41.91 75.56,43.18 IC3.2 | 76.83,41.91 85.09,41.91 86.36,43.18 IC2.2 | 76.83,41.91 66.67,41.91 65.41,43.18 64.14,43.18 63.5,43.81 S3.6
  Bottom 0.152: S3.1 66.04,48.26 64.14,46.35 64.14,44.45 63.5,43.81 S3.6
N$3  (via drill 0.35)
  Top 0.152: S3.3 66.67,43.81 68.58,45.72 v75.56,45.72 87,45.72 88.9,43.81 IC2.3
  Bottom 0.152: S3.4 62.87,48.9 64.77,48.9 65.41,49.53 67.94,49.53 68.58,48.9 68.58,45.72 66.67,43.81 S3.3 | v75.56,45.72 77.47,43.81 IC3.3
N$4  (via drill 0.35)
  Top 0.152: v43.81,9.53 43.81,12.7 MCU2.TX2
  Bottom 0.152: v43.81,9.53 51.44,9.53 52.7,8.26 U2.3
N$5  (via drill 0.35)
  Top 0.152: v45.09,8.89 41.27,8.89 41.27,12.7 MCU2.RX2
  Bottom 0.152: v45.09,8.89 49.53,8.89 50.16,8.26 U2.2
N$6  (via drill 0.35)
  Top 0.152: v2.54,71.75 7.62,76.83 29.21,76.83 36.83,69.22 43.81,69.22 46.99,66.04 49.53,66.04 50.8,67.31 50.8,68.58 52.07,69.85 52.07,71.12 50.8,71.12 50.8,72.39 87.63,72.39 87.63,74.3 87,74.3 S1.3
  Bottom 0.152: v2.54,71.75 1.91,71.12 1.91,27.3 6.35,22.86 X1.21
N$7
  Top 0.152: U$3.1 97.16,70.48 95.89,69.22 88.9,69.22 87,67.31 S1.1
  Bottom 0.152: R4.2 80.64,78.11 80.64,73.03 86.36,67.31 S1.1
N$8
  Top 0.152: JP7.1 36.83,52.7 33.02,52.7 U1.2
N$9
  Top 0.152: JP6.1 63.5,55.24 60.96,55.24 59.69,53.98 U$1.1
N$10  (via drill 0.35)
  Top 0.152: v79.38,28.57 72.39,28.57 JP2.1
  Bottom 0.152: v79.38,28.57 93.34,28.57 95.25,30.48 U$2.1
N$11  (via drill 0.35)
  Top 0.152: v4.45,72.39 8.26,76.2 26.67,76.2 28.57,74.3 28.57,72.39 27.3,72.39 26.04,71.12 J8.3
  Bottom 0.152: v4.45,72.39 4.45,73.66 JP11.3 | JP12.1 5.71,76.2 17.14,76.2 20.95,72.39 24.13,72.39 25.4,71.12 J8.3
N$12  (via drill 0.35)
  Top 0.152: v66.04,10.79 73.03,10.79 73.03,13.97 70.48,16.51 48.26,16.51 47.62,15.88 23.5,15.88 MCU2.22
  Bottom 0.152: v66.04,10.79 63.5,8.26 U2.7
N$13
  Top 0.152: JP3.1 45.09,24.13 46.35,22.86 48.9,22.86 50.16,24.13 J1.2
N$14
  Bottom 0.152: JP4.1 97.16,61.59 97.16,58.42 95.89,57.15 95.89,56.52 97.16,55.24 U3.2
N$15  (via drill 0.35)
  Top 0.152: v4.45,69.22 18.41,69.22 19.68,70.48 J8.5
  Bottom 0.152: v4.45,69.22 4.45,70.48 JP10.3
N$16
  Bottom 0.152: JP12.3 4.45,76.83 4.45,78.11 22.86,78.11 26.67,74.3 J8.7
N$17
  Top 0.152: IC1.8 14.61,60.33 15.24,60.96 22.86,60.96 25.4,63.5 28.57,63.5 31.11,66.04 R2.1
N$18
  Bottom 0.152: JP10.1 5.71,71.12 5.71,73.66 JP11.1 5.71,74.3 5.71,74.93 5.08,75.56 3.81,75.56 3.17,76.2 3.17,77.47 4.45,78.74 24.13,78.74 28.57,74.3 28.57,71.12 J8.2
N$19
  Bottom 0.152: JP5.1 62.87,40.01 60.33,40.01 59.69,40.64 U$1.6
N$20
  Bottom 0.152: JP1.1 62.87,36.83 60.96,36.83 59.69,38.1 U$1.7
N$21  (via drill 0.35)
  Top 0.152: v64.77,36.2 59.69,36.2 U$1.8
  Bottom 0.152: v64.77,36.2 66.67,34.29 66.67,31.11 64.14,28.57 62.87,28.57 62.87,27.94 JP9.2
N$22
  Bottom 0.152: JP8.2 62.87,32.38 60.33,32.38 59.69,33.02 U$1.9
NPD  (via drill 0.35)
  Top 0.152: v69.85,27.94 25.4,27.94 23.5,29.84 22.23,29.84 20.95,28.57 MCU2.33
  Bottom 0.152: v69.85,27.94 69.85,26.04 68.58,24.77 J1.9
PPS  (via drill 0.35)
  Top 0.152: v12.06,52.7 12.06,31.75 20.32,23.5 MCU2.29 | v27.3,69.22 27.94,68.58 43.81,68.58 48.9,63.5 66.67,63.5 69.22,60.96 69.22,59.69 69.85,59.69 76.83,52.7 80.64,52.7 83.82,49.53 92.71,49.53 95.25,52.07 95.25,59.05 96.52,59.05 97.79,57.78 U3.1
  Bottom 0.152: v12.06,52.7 12.06,59.69 13.34,60.96 15.24,60.96 20.32,66.04 20.32,67.94 21.59,69.22 v27.3,69.22
RPI_RX  (via drill 0.35)
  Top 0.152: v38.73,8.89 38.73,12.7 MCU2.TX1 | J2.2 68.58,1.91 67.94,1.27 43.81,1.27 43.18,1.91 TP15.TP
  Bottom 0.152: v38.73,8.89 41.27,6.35 41.27,3.81 42.55,2.54 TP15.TP
RPI_TX
  Top 0.152: J2.1 71.12,2.54 68.58,5.08 43.18,5.08 TP14.TP
  Bottom 0.152: MCU2.RX1 35.56,12.7 34.29,11.43 34.29,8.26 36.83,8.26 38.1,9.53 39.37,9.53 43.18,5.71 TP14.TP
RST  (via drill 0.35)
  Top 0.152: v57.15,34.92 66.04,34.92 67.31,33.66 v69.22,33.66
  Bottom 0.152: v57.15,34.92 53.98,38.1 MCU2.RESET_ICSP | v69.22,33.66 67.94,32.38 67.94,27.3 65.41,24.77 J1.8
SCK  (via drill 0.35)
  Top 0.152: U$2.4 87.63,30.48 86.36,29.21 82.55,29.21 81.92,29.84 81.92,32.38 58.42,32.38 55.24,35.56 53.98,35.56 MCU2.SCK_ICSP | v19.68,8.26 24.13,3.81 24.13,2.54 TP7.TP | v19.68,12.06 29.21,12.06 30.48,10.79 v38.1,10.79
  Bottom 0.152: 58.42,31.75 62.87,31.75 JP8.1 | 58.42,31.75 53.98,36.2 MCU2.SCK_ICSP | 52.07,13.34 52.07,15.24 57.15,20.32 57.15,21.59 58.42,22.86 59.69,22.86 | 52.07,13.34 52.07,12.06 53.34,10.79 57.78,10.79 60.33,8.26 U2.6 | 59.69,22.86 61.59,22.86 62.87,24.13 J1.7 | v19.68,12.06 v19.68,8.26 | v38.1,10.79 49.53,10.79 52.07,13.34 | 58.42,31.75 58.42,26.04 59.69,24.77 59.69,22.86
SCK_5V  (via drill 0.35)
  Top 0.152: X4.3 53.34,69.85 54.61,68.58 69.22,68.58 70.48,69.85 71.12,69.85 X2.3 71.75,69.85 72.39,69.85 73.66,68.58 74.3,68.58 74.93,69.22 82.55,69.22 v82.55,67.31 | v87.63,40.01 92.08,40.01 92.08,29.84 93.34,28.57 97.79,28.57 97.79,26.67 93.34,22.23 62.23,22.23 60.96,20.95 U2.16 | v90.17,59.69 90.17,64.77 v85.09,64.77
  Bottom 0.152: v87.63,40.01 85.72,41.91 85.72,47.62 88.27,50.16 88.27,57.78 v90.17,59.69 | v82.55,67.31 v85.09,64.77
SCL1  (via drill 0.35)
  Top 0.152: v61.59,35.56 65.41,35.56 65.41,37.47 57.15,37.47 54.61,40.01 40.64,40.01 38.1,37.47 33.02,37.47 U1.8 | v22.23,10.79 26.67,10.79 26.67,7.62 27.3,6.99 27.3,5.71 29.21,3.81 29.21,2.54 TP9.TP | v28.57,17.14 97.79,17.14 97.79,13.34 MCU2.SCL1
  Bottom 0.152: R6.2 91.44,4.45 97.79,10.79 97.79,12.7 MCU2.SCL1 | v61.59,35.56 61.59,34.92 62.87,33.66 JP8.3 | v22.23,10.79 v28.57,17.14 33.02,21.59 33.02,36.83 U1.8
SDA1  (via drill 0.35)
  Top 0.152: v61.59,28.57 60.33,29.84 v48.9,29.84 | v29.21,13.97 30.48,15.24 v47.62,15.24 48.26,15.88 v69.22,15.88 | v72.39,15.88 92.71,15.88 95.25,13.34 MCU2.SDA1
  Bottom 0.152: R5.2 91.44,7.62 91.44,8.89 95.25,12.7 MCU2.SDA1 | v61.59,28.57 62.87,27.3 JP9.3 | U1.7 33.02,40.01 38.73,40.01 v48.9,29.84 52.07,26.67 52.07,19.68 v47.62,15.24 | v29.21,13.97 29.21,12.06 29.84,11.43 29.84,6.35 TP8.TP | v69.22,15.88 v72.39,15.88
VIN  (via drill 0.35)
  Top 0.152: X4.2 54.61,67.31 55.88,66.04 71.12,66.04 72.39,67.31 X2.2 | v33.02,57.78 11.43,57.78 11.43,31.75 13.97,29.21 13.97,6.35 TP1.TP
  Bottom 0.152: MCU2.VIN 71.75,61.59 71.75,66.67 72.39,67.31 X2.2 | v33.02,57.78 31.75,59.05 25.4,59.05 24.13,60.33 24.13,62.23 25.4,63.5 34.92,63.5 43.81,72.39 52.7,72.39 54.61,70.48 54.61,67.94 X4.2